# EAGLE board reclone-rise (EAGLE 7.5.0), part 1 of 2
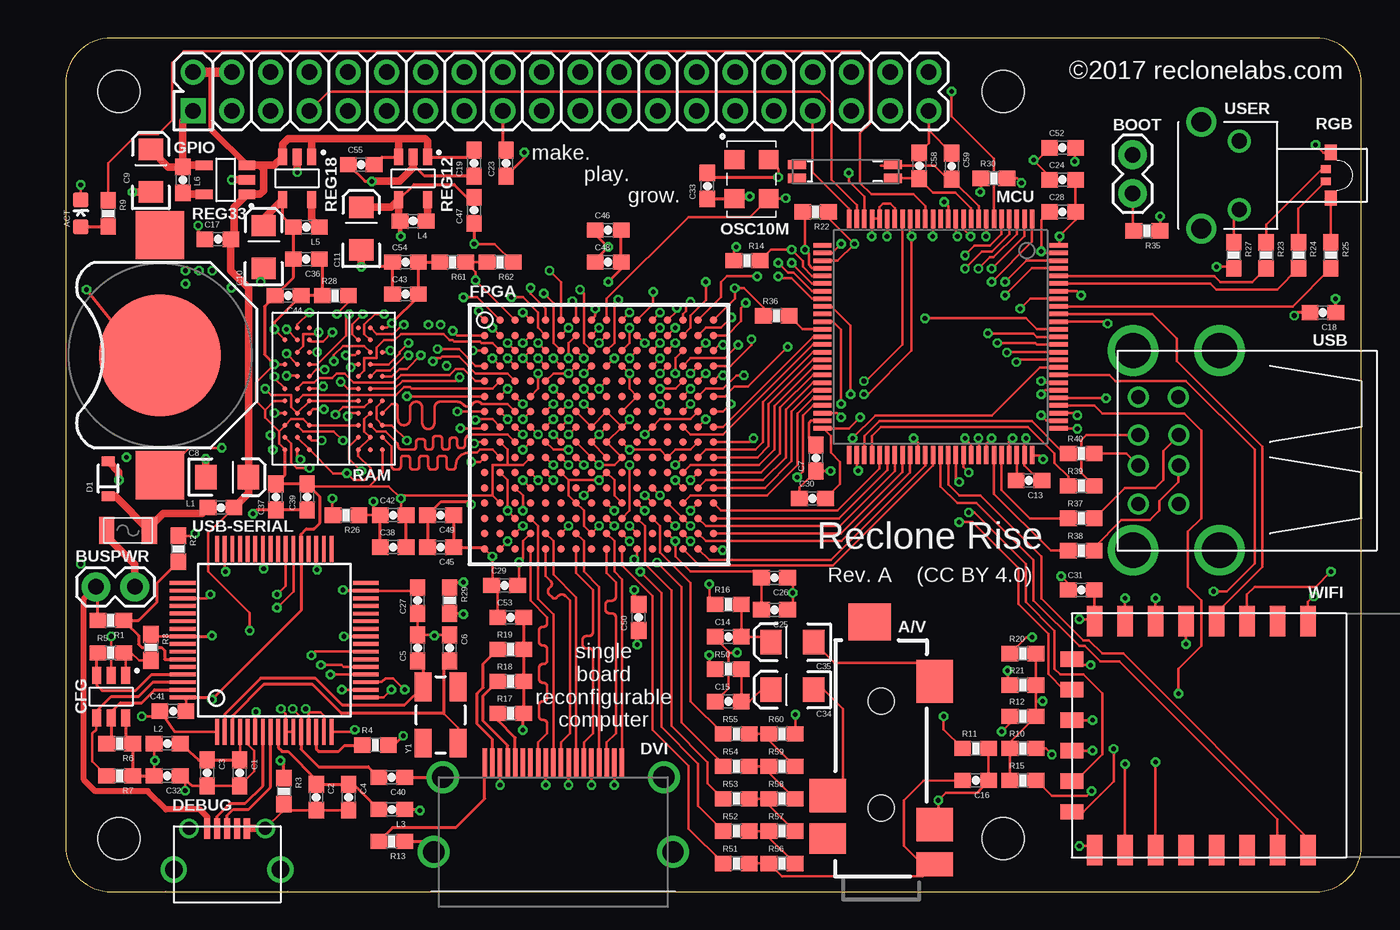
[diagram p0: board, top side]
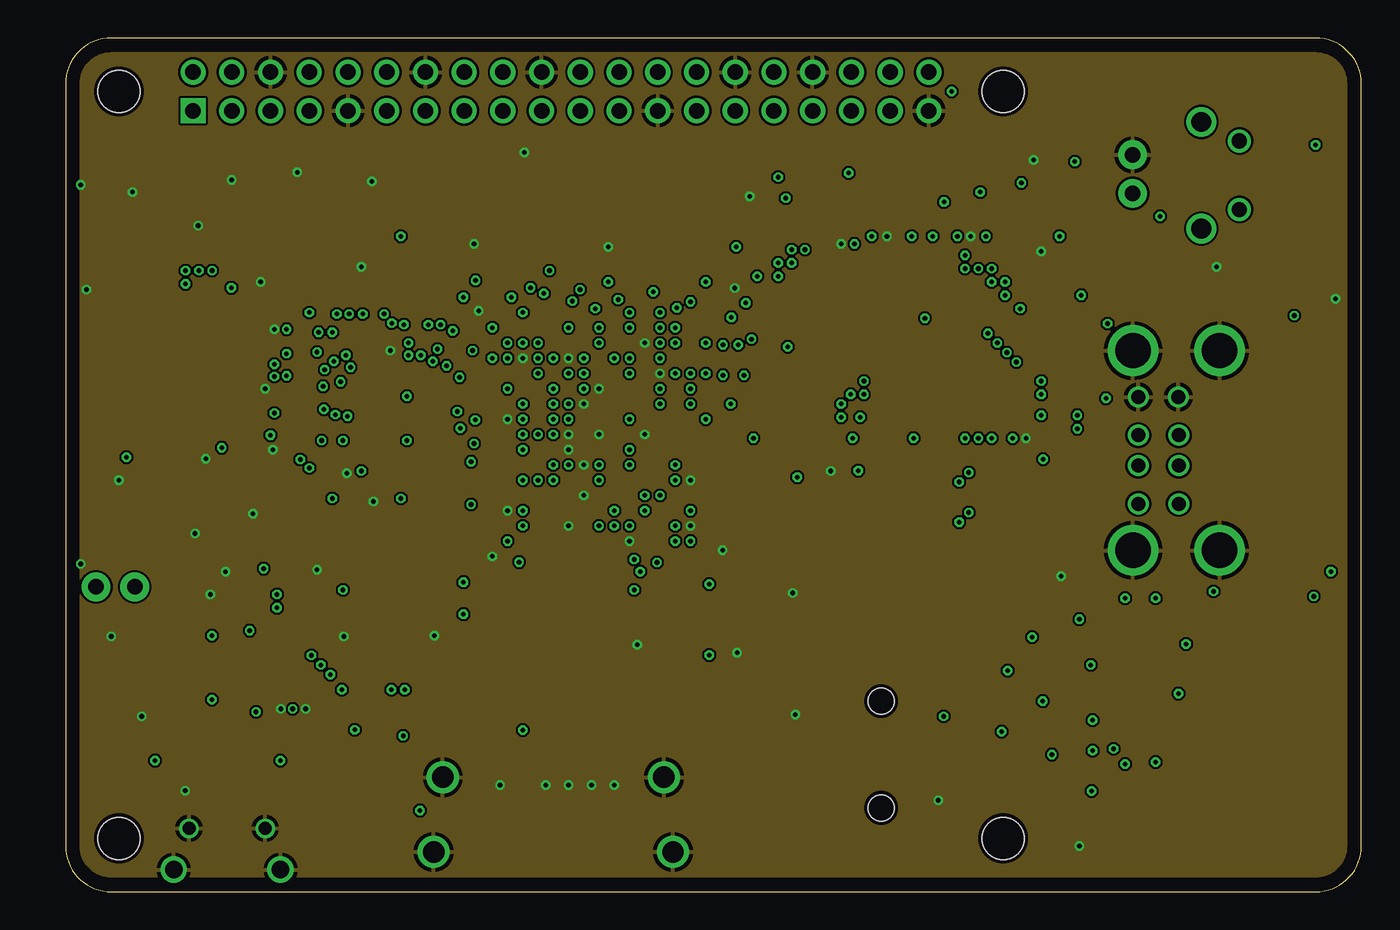
[diagram p1: board, inner layer GndPlane]
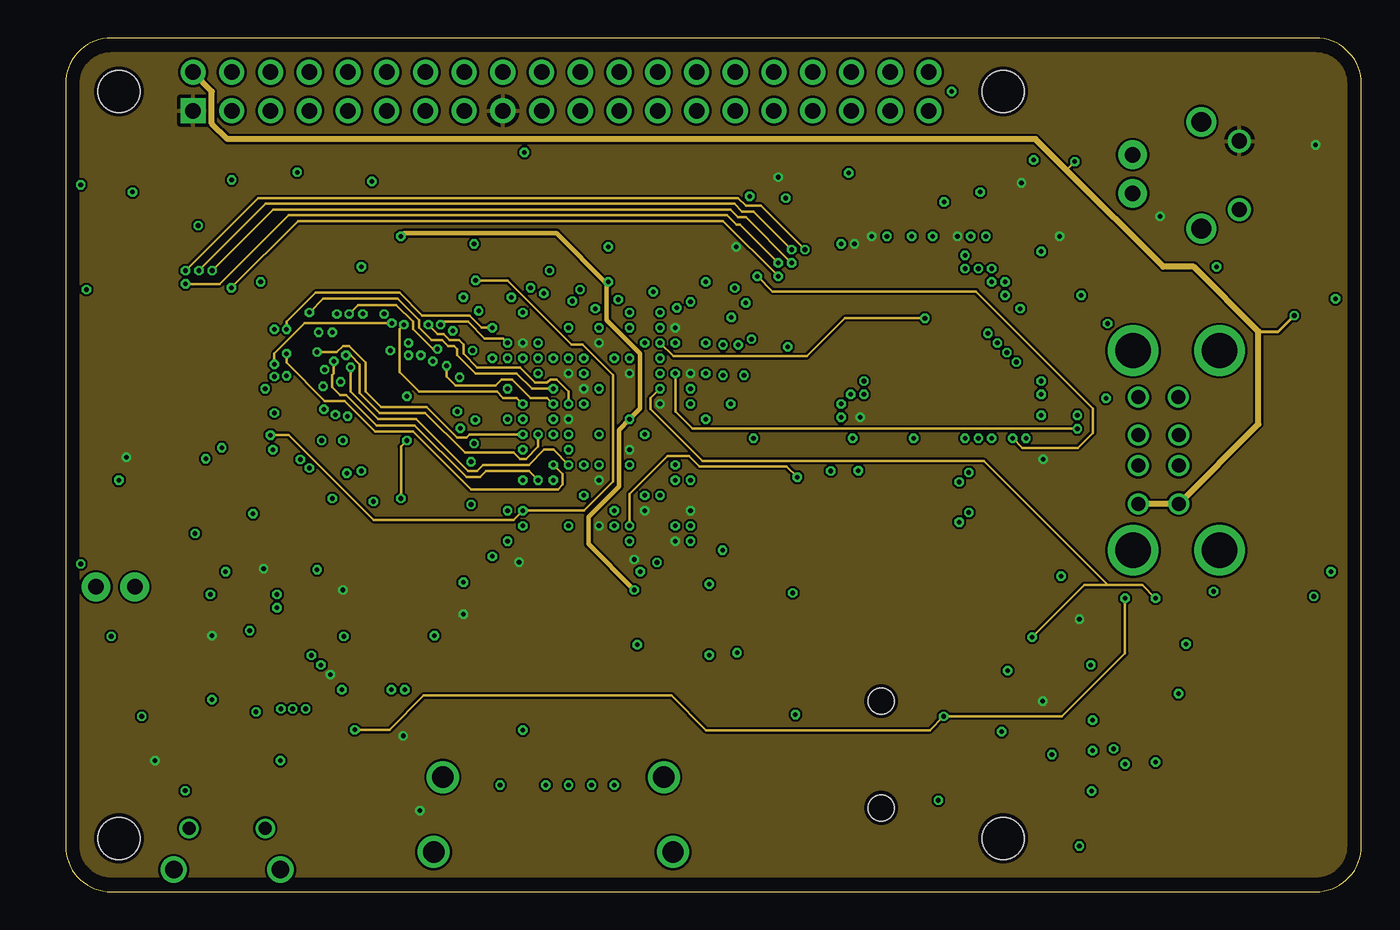
[diagram p2: board, inner layer PwrPlane]
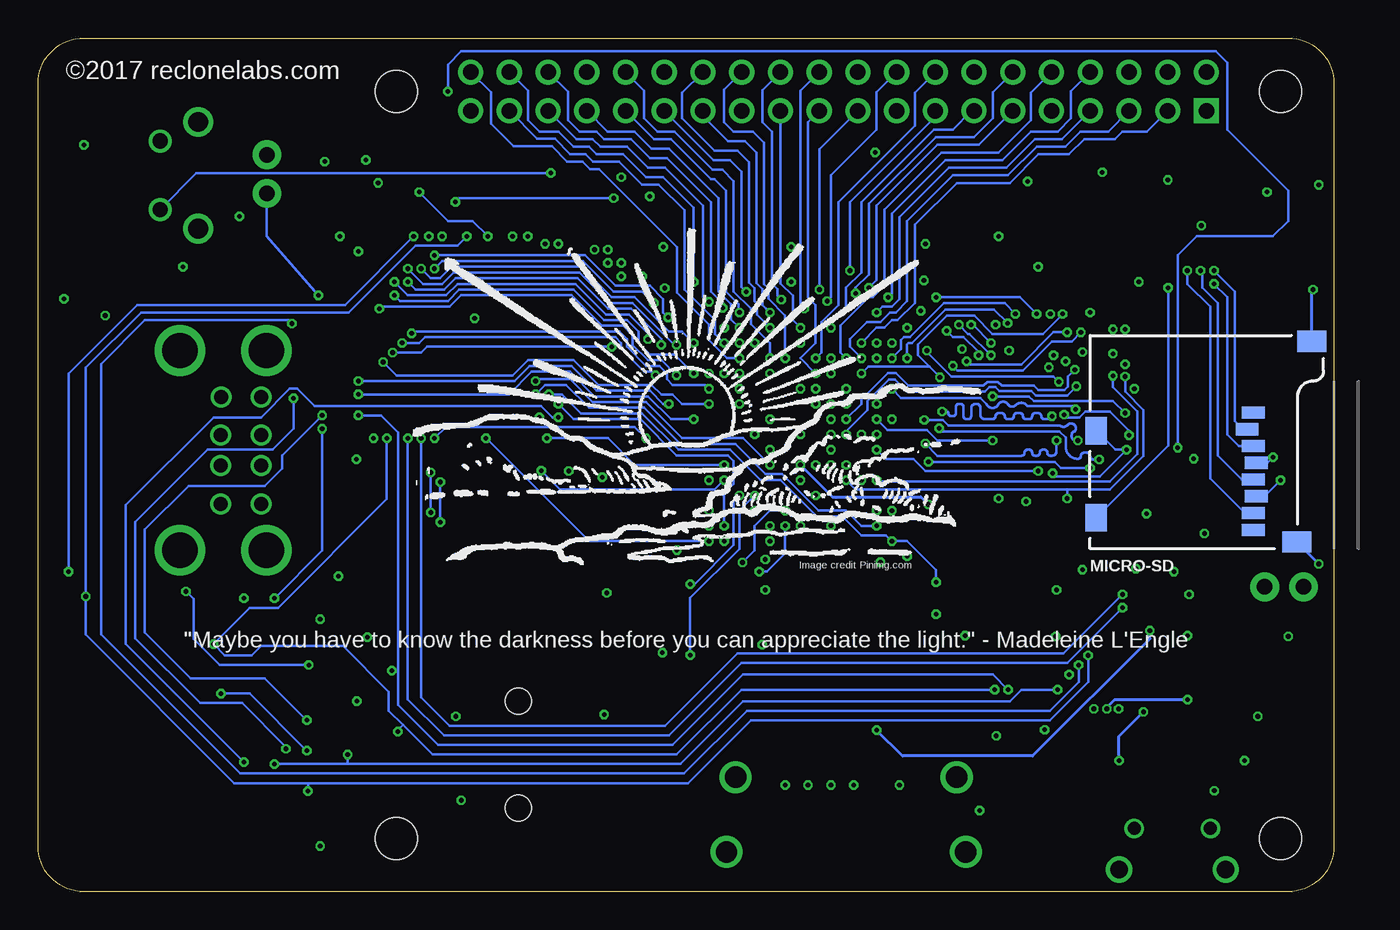
[diagram p3: board, bottom side, seen from below]

Size 85 x 56 mm. Coordinates in mm from the lower left corner, seen from the top.
Outline: 0,53 0,3 arc90 3,0 82,0 arc90 85,3 85,53 arc90 82,56 3,56 arc90 0,53
Copper layers (1*2*15*16): Top 0.035mm / dielectric 0.2mm / GndPlane 0.0175mm / dielectric 1.1mm / PwrPlane 0.0175mm / dielectric 0.2mm / Bottom 0.035mm
Design rules "SeeedStudio_DRU_no_angle_20130527": minimum track width 6mil, minimum drill 12mil, track to track 6mil, track to pad 6mil, pad to pad 6mil, via to via 6mil, smd to smd 0mil, copper to edge 10mil, drill to drill 10mil, minimum pad ring 6mil, minimum via ring 6mil, stop-mask expansion 2mil, vias tented up to drill 25mil, thermal gap 10mil
Net classes: 0 default: width 0.152 mm, drill 0.305 mm
Holes 2.75 mm at 3.5,3.5 3.5,52.5 61.5,52.5 61.5,3.5

## Footprints (pad centres in the part's own frame; a part is rotated, then mirrored left to right if it is on the bottom)
AV-JACK-3.5MM-4COND-SMD = smd 2 x 2.4: NP@6 2.5,3.5 | smd 2.2 x 2.4: RING1 5.3,3.5; RING2 3.4,-3.5 | smd 1.6 x 2.4: SLEEVE 0.8,-3.5 | smd 2.8 x 2.4: TIP 12.8,-3.5 | smd 2.4 x 2.8: TIP-SWITCH 16.7,0.75 | hole 1.7: 4.5,0; 11.5,0
LED-0603 = smd 1 x 1: A 0,-0.877; C 0,0.877
BATTCON_12MM = smd 8 x 8: GND 0,0 | smd 3.175 x 3.175: PWR@1 -7.874,0; PWR@2 7.874,0
1X02 = drill 1.016 pad 1.88: 1 0,0; 2 2.54,0
0603-CAP = smd 1.1 x 1: 1 -0.85,0; 2 0.85,0
EIA3216 = smd 1.4 x 1.6: A 1.4,0; C -1.4,0
SOT-23-6 = smd 0.6 x 1.1: 1 -0.95,-1.4; 2 0,-1.4; 3 0.95,-1.4; 4 0.95,1.4; 5 0,1.4; 6 -0.95,1.4
SOD-323 = smd 0.63 x 0.83: A 1.15,0; C -1.15,0
USB-MICRO-B-SMD = smd 0.4 x 1.35: 1 -1.3,4.15; 2 -0.65,4.15; 3 0,4.15; 4 0.65,4.15; 5 1.3,4.15 | drill 1.15: MNT1 -3.5,1.45; MNT4 3.5,1.45 | drill 0.85: MNT2 -2.5,4.15; MNT3 2.5,4.15
TMDS_A_SMT = smd 1.9 x 0.3: P1 -4.76,4.5; P2 -4.76,4; P3 -4.76,3.5; P4 -4.76,3; P5 -4.76,2.5; P6 -4.76,2; P7 -4.76,1.5; P8 -4.76,1; P9 -4.76,0.5; P10 -4.76,0; P11 -4.76,-0.5; P12 -4.76,-1; P13 -4.76,-1.5; P14 -4.76,-2; P15 -4.76,-2.5; P16 -4.76,-3; P17 -4.76,-3.5; P18 -4.76,-4; P19 -4.76,-4.5 | drill 1.4: SH1 1.09,7.85; SH2 -3.81,7.25; SH3 -3.81,-7.25; SH4 1.09,-7.85
1206L = smd 1 x 1.8: 1 -1.4,0; 2 1.4,0
FT256 = smd 0.5 x 0.5: A1 -7.5,7.5; A2 -6.5,7.5; A3 -5.5,7.5; A4 -4.5,7.5; A5 -3.5,7.5; A6 -2.5,7.5; A7 -1.5,7.5; A8 -0.5,7.5; A9 0.5,7.5; A10 1.5,7.5; A11 2.5,7.5; A12 3.5,7.5; A13 4.5,7.5; A14 5.5,7.5; A15 6.5,7.5; A16 7.5,7.5; B1 -7.5,6.5; B2 -6.5,6.5; B3 -5.5,6.5; B4 -4.5,6.5; B5 -3.5,6.5; B6 -2.5,6.5; B7 -1.5,6.5; B8 -0.5,6.5; B9 0.5,6.5; B10 1.5,6.5; B11 2.5,6.5; B12 3.5,6.5; B13 4.5,6.5; B14 5.5,6.5; B15 6.5,6.5; B16 7.5,6.5; C1 -7.5,5.5; C2 -6.5,5.5; C3 -5.5,5.5; C4 -4.5,5.5; C5 -3.5,5.5; C6 -2.5,5.5; C7 -1.5,5.5; C8 -0.5,5.5; C9 0.5,5.5; C10 1.5,5.5; C11 2.5,5.5; C12 3.5,5.5; C13 4.5,5.5; C14 5.5,5.5; C15 6.5,5.5; C16 7.5,5.5; D1 -7.5,4.5; D2 -6.5,4.5; D3 -5.5,4.5; D4 -4.5,4.5; D5 -3.5,4.5; D6 -2.5,4.5; D7 -1.5,4.5; D8 -0.5,4.5; D9 0.5,4.5; D10 1.5,4.5; D11 2.5,4.5; D12 3.5,4.5; D13 4.5,4.5; D14 5.5,4.5; D15 6.5,4.5; D16 7.5,4.5; E1 -7.5,3.5; E2 -6.5,3.5; E3 -5.5,3.5; E4 -4.5,3.5; E5 -3.5,3.5; E6 -2.5,3.5; E7 -1.5,3.5; E8 -0.5,3.5; E9 0.5,3.5; E10 1.5,3.5; E11 2.5,3.5; E12 3.5,3.5; E13 4.5,3.5; E14 5.5,3.5; E15 6.5,3.5; E16 7.5,3.5; F1 -7.5,2.5; F2 -6.5,2.5; F3 -5.5,2.5; F4 -4.5,2.5; F5 -3.5,2.5; F6 -2.5,2.5; F7 -1.5,2.5; F8 -0.5,2.5; F9 0.5,2.5; F10 1.5,2.5; F11 2.5,2.5; F12 3.5,2.5; F13 4.5,2.5; F14 5.5,2.5; F15 6.5,2.5; F16 7.5,2.5; G1 -7.5,1.5; G2 -6.5,1.5; G3 -5.5,1.5; G4 -4.5,1.5; G5 -3.5,1.5; G6 -2.5,1.5; G7 -1.5,1.5; G8 -0.5,1.5; G9 0.5,1.5; G10 1.5,1.5; G11 2.5,1.5; G12 3.5,1.5; G13 4.5,1.5; G14 5.5,1.5; G15 6.5,1.5; G16 7.5,1.5; H1 -7.5,0.5; H2 -6.5,0.5; H3 -5.5,0.5; H4 -4.5,0.5; H5 -3.5,0.5; H6 -2.5,0.5; H7 -1.5,0.5; H8 -0.5,0.5; H9 0.5,0.5; H10 1.5,0.5; H11 2.5,0.5; H12 3.5,0.5; H13 4.5,0.5; H14 5.5,0.5; H15 6.5,0.5; H16 7.5,0.5; J1 -7.5,-0.5; J2 -6.5,-0.5; J3 -5.5,-0.5; J4 -4.5,-0.5; J5 -3.5,-0.5; J6 -2.5,-0.5; J7 -1.5,-0.5; J8 -0.5,-0.5; J9 0.5,-0.5; J10 1.5,-0.5; J11 2.5,-0.5; J12 3.5,-0.5; J13 4.5,-0.5; J14 5.5,-0.5; J15 6.5,-0.5; J16 7.5,-0.5; K1 -7.5,-1.5; K2 -6.5,-1.5; K3 -5.5,-1.5; K4 -4.5,-1.5; K5 -3.5,-1.5; K6 -2.5,-1.5; K7 -1.5,-1.5; K8 -0.5,-1.5; K9 0.5,-1.5; K10 1.5,-1.5; K11 2.5,-1.5; K12 3.5,-1.5; K13 4.5,-1.5; K14 5.5,-1.5; K15 6.5,-1.5; K16 7.5,-1.5; L1 -7.5,-2.5; L2 -6.5,-2.5; L3 -5.5,-2.5; L4 -4.5,-2.5; L5 -3.5,-2.5; L6 -2.5,-2.5; L7 -1.5,-2.5; L8 -0.5,-2.5; L9 0.5,-2.5; L10 1.5,-2.5; L11 2.5,-2.5; L12 3.5,-2.5; L13 4.5,-2.5; L14 5.5,-2.5; L15 6.5,-2.5; L16 7.5,-2.5; M1 -7.5,-3.5; M2 -6.5,-3.5; M3 -5.5,-3.5; M4 -4.5,-3.5; M5 -3.5,-3.5; M6 -2.5,-3.5; M7 -1.5,-3.5; M8 -0.5,-3.5; M9 0.5,-3.5; M10 1.5,-3.5; M11 2.5,-3.5; M12 3.5,-3.5; M13 4.5,-3.5; M14 5.5,-3.5; M15 6.5,-3.5; M16 7.5,-3.5; N1 -7.5,-4.5; N2 -6.5,-4.5; N3 -5.5,-4.5; N4 -4.5,-4.5; N5 -3.5,-4.5; N6 -2.5,-4.5; N7 -1.5,-4.5; N8 -0.5,-4.5; N9 0.5,-4.5; N10 1.5,-4.5; N11 2.5,-4.5; N12 3.5,-4.5; N13 4.5,-4.5; N14 5.5,-4.5; N15 6.5,-4.5; N16 7.5,-4.5; P1 -7.5,-5.5; P2 -6.5,-5.5; P3 -5.5,-5.5; P4 -4.5,-5.5; P5 -3.5,-5.5; P6 -2.5,-5.5; P7 -1.5,-5.5; P8 -0.5,-5.5; P9 0.5,-5.5; P10 1.5,-5.5; P11 2.5,-5.5; P12 3.5,-5.5; P13 4.5,-5.5; P14 5.5,-5.5; P15 6.5,-5.5; P16 7.5,-5.5; R1 -7.5,-6.5; R2 -6.5,-6.5; R3 -5.5,-6.5; R4 -4.5,-6.5; R5 -3.5,-6.5; R6 -2.5,-6.5; R7 -1.5,-6.5; R8 -0.5,-6.5; R9 0.5,-6.5; R10 1.5,-6.5; R11 2.5,-6.5; R12 3.5,-6.5; R13 4.5,-6.5; R14 5.5,-6.5; R15 6.5,-6.5; R16 7.5,-6.5; T1 -7.5,-7.5; T2 -6.5,-7.5; T3 -5.5,-7.5; T4 -4.5,-7.5; T5 -3.5,-7.5; T6 -2.5,-7.5; T7 -1.5,-7.5; T8 -0.5,-7.5; T9 0.5,-7.5; T10 1.5,-7.5; T11 2.5,-7.5; T12 3.5,-7.5; T13 4.5,-7.5; T14 5.5,-7.5; T15 6.5,-7.5; T16 7.5,-7.5
2X20 = drill 1.016 pad 1.651 square: 1 -24.13,-1.27 | drill 1.016 pad 1.651: 2 -24.13,1.27; 3 -21.59,-1.27; 4 -21.59,1.27; 5 -19.05,-1.27; 6 -19.05,1.27; 7 -16.51,-1.27; 8 -16.51,1.27; 9 -13.97,-1.27; 10 -13.97,1.27; 11 -11.43,-1.27; 12 -11.43,1.27; 13 -8.89,-1.27; 14 -8.89,1.27; 15 -6.35,-1.27; 16 -6.35,1.27; 17 -3.81,-1.27; 18 -3.81,1.27; 19 -1.27,-1.27; 20 -1.27,1.27; 21 1.27,-1.27; 22 1.27,1.27; 23 3.81,-1.27; 24 3.81,1.27; 25 6.35,-1.27; 26 6.35,1.27; 27 8.89,-1.27; 28 8.89,1.27; 29 11.43,-1.27; 30 11.43,1.27; 31 13.97,-1.27; 32 13.97,1.27; 33 16.51,-1.27; 34 16.51,1.27; 35 19.05,-1.27; 36 19.05,1.27; 37 21.59,-1.27; 38 21.59,1.27; 39 24.13,-1.27; 40 24.13,1.27
0603 = smd 1.1 x 1: 1 -0.85,0; 2 0.85,0
LQFP-100 = smd 0.3 x 1.2: 1 -6,-7.75; 2 -5.5,-7.75; 3 -5,-7.75; 4 -4.5,-7.75; 5 -4,-7.75; 6 -3.5,-7.75; 7 -3,-7.75; 8 -2.5,-7.75; 9 -2,-7.75; 10 -1.5,-7.75; 11 -1,-7.75; 12 -0.5,-7.75; 13 0,-7.75; 14 0.5,-7.75; 15 1,-7.75; 16 1.5,-7.75; 17 2,-7.75; 18 2.5,-7.75; 19 3,-7.75; 20 3.5,-7.75; 21 4,-7.75; 22 4.5,-7.75; 23 5,-7.75; 24 5.5,-7.75; 25 6,-7.75; 51 6,7.75; 52 5.5,7.75; 53 5,7.75; 54 4.5,7.75; 55 4,7.75; 56 3.5,7.75; 57 3,7.75; 58 2.5,7.75; 59 2,7.75; 60 1.5,7.75; 61 1,7.75; 62 0.5,7.75; 63 0,7.75; 64 -0.5,7.75; 65 -1,7.75; 66 -1.5,7.75; 67 -2,7.75; 68 -2.5,7.75; 69 -3,7.75; 70 -3.5,7.75; 71 -4,7.75; 72 -4.5,7.75; 73 -5,7.75; 74 -5.5,7.75; 75 -6,7.75 | smd 1.2 x 0.3: 26 7.75,-6; 27 7.75,-5.5; 28 7.75,-5; 29 7.75,-4.5; 30 7.75,-4; 31 7.75,-3.5; 32 7.75,-3; 33 7.75,-2.5; 34 7.75,-2; 35 7.75,-1.5; 36 7.75,-1; 37 7.75,-0.5; 38 7.75,0; 39 7.75,0.5; 40 7.75,1; 41 7.75,1.5; 42 7.75,2; 43 7.75,2.5; 44 7.75,3; 45 7.75,3.5; 46 7.75,4; 47 7.75,4.5; 48 7.75,5; 49 7.75,5.5; 50 7.75,6; 76 -7.75,6; 77 -7.75,5.5; 78 -7.75,5; 79 -7.75,4.5; 80 -7.75,4; 81 -7.75,3.5; 82 -7.75,3; 83 -7.75,2.5; 84 -7.75,2; 85 -7.75,1.5; 86 -7.75,1; 87 -7.75,0.5; 88 -7.75,0; 89 -7.75,-0.5; 90 -7.75,-1; 91 -7.75,-1.5; 92 -7.75,-2; 93 -7.75,-2.5; 94 -7.75,-3; 95 -7.75,-3.5; 96 -7.75,-4; 97 -7.75,-4.5; 98 -7.75,-5; 99 -7.75,-5.5; 100 -7.75,-6
MICRO-SD-SOCKET-PP = smd 0.8 x 1.5: 1 -3.44,-5.3; 2 -2.34,-5.7; 3 -1.24,-5.3; 4 -0.14,-5.1; 5 0.96,-5.3; 6 2.06,-5.1; 7 3.16,-5.3; 8 4.26,-5.3 | smd 1.8 x 1.4: CD 3.45,-15.6; GND2 -2.25,-15.6 | smd 1.4 x 1.9: GND1 -8.1,-1.45; GND3 5.05,-2.45
OSC-5X3.2 = smd 1.24 x 1.29: 1 -1.27,-1.125; 2 1.27,-1.125; 3 1.27,1.125; 4 -1.27,1.125
0603-RES = smd 1.1 x 1: 1 -0.85,0; 2 0.85,0
60-FBGA-8X10 = smd 0.34 x 0.34: A1 -3.2,4; A2 -2.4,4; A3 -1.6,4; A7 1.6,4; A8 2.4,4; A9 3.2,4; B1 -3.2,3.2; B2 -2.4,3.2; B3 -1.6,3.2; B7 1.6,3.2; B8 2.4,3.2; B9 3.2,3.2; C1 -3.2,2.4; C2 -2.4,2.4; C3 -1.6,2.4; C7 1.6,2.4; C8 2.4,2.4; C9 3.2,2.4; D1 -3.2,1.6; D2 -2.4,1.6; D3 -1.6,1.6; D7 1.6,1.6; D8 2.4,1.6; D9 3.2,1.6; E1 -3.2,0.8; E2 -2.4,0.8; E3 -1.6,0.8; E7 1.6,0.8; E8 2.4,0.8; E9 3.2,0.8; F2 -2.4,0; F3 -1.6,0; F7 1.6,0; F8 2.4,0; F9 3.2,0; G1 -3.2,-0.8; G2 -2.4,-0.8; G3 -1.6,-0.8; G7 1.6,-0.8; G8 2.4,-0.8; H2 -2.4,-1.6; H3 -1.6,-1.6; H7 1.6,-1.6; H8 2.4,-1.6; H9 3.2,-1.6; J1 -3.2,-2.4; J2 -2.4,-2.4; J3 -1.6,-2.4; J7 1.6,-2.4; J8 2.4,-2.4; K2 -2.4,-3.2; K3 -1.6,-3.2; K7 1.6,-3.2; K8 2.4,-3.2; K9 3.2,-3.2; L1 -3.2,-4; L2 -2.4,-4; L3 -1.6,-4; L7 1.6,-4; L8 2.4,-4
SOT-23-5 = smd 0.6 x 1.1: 1 -0.95,-1.4; 2 0,-1.4; 3 0.95,-1.4; 4 0.95,1.4; 5 -0.95,1.4
RGB_LED_1204_RTANG = smd 0.65 x 0.5: 1 0.325,-0.4; 2 0.325,0.4 | smd 0.8 x 1: 3 0,1.5; 4 0,-1.5
USB-A-2H = drill 0.914: DM1 -4.027,1.05; DM2 -1.37,1.05; DP1 -4.027,-0.95; DP2 -1.37,-0.95; GND1 -3.99,-3.45; GND2 -1.37,-3.45; VBUS1 -4.027,3.55; VBUS2 -1.37,3.55 | drill 2.311: SH1 -6.7,-6.5; SH2 -1.02,-6.5; SH3 -1.02,6.6; SH4 -6.7,6.6
TQFP64-12X12 = smd 0.25 x 1.7: 1 -3.75,-6; 2 -3.25,-6; 3 -2.75,-6; 4 -2.25,-6; 5 -1.75,-6; 6 -1.25,-6; 7 -0.75,-6; 8 -0.25,-6; 9 0.25,-6; 10 0.75,-6; 11 1.25,-6; 12 1.75,-6; 13 2.25,-6; 14 2.75,-6; 15 3.25,-6; 16 3.75,-6; 33 3.75,6; 34 3.25,6; 35 2.75,6; 36 2.25,6; 37 1.75,6; 38 1.25,6; 39 0.75,6; 40 0.25,6; 41 -0.25,6; 42 -0.75,6; 43 -1.25,6; 44 -1.75,6; 45 -2.25,6; 46 -2.75,6; 47 -3.25,6; 48 -3.75,6 | smd 1.7 x 0.25: 17 6,-3.75; 18 6,-3.25; 19 6,-2.75; 20 6,-2.25; 21 6,-1.75; 22 6,-1.25; 23 6,-0.75; 24 6,-0.25; 25 6,0.25; 26 6,0.747; 27 6,1.247; 28 6,1.747; 29 6,2.247; 30 6,2.747; 31 6,3.247; 32 6,3.747; 49 -6,3.75; 50 -6,3.25; 51 -6,2.75; 52 -6,2.25; 53 -6,1.75; 54 -6,1.25; 55 -6,0.75; 56 -6,0.25; 57 -6,-0.25; 58 -6,-0.75; 59 -6,-1.25; 60 -6,-1.75; 61 -6,-2.25; 62 -6,-2.75; 63 -6,-3.25; 64 -6,-3.75
PB_TACT_RTANG = drill 1.3: MNT_A -3.5,2.5; MNT_B 3.5,2.5 | drill 1: SW_A -2.25,0; SW_B 2.25,0
ESP-12F = smd 2 x 1: 1 -7.5,-2.5; 2 -7.5,-4.5; 3 -7.5,-6.5; 4 -7.5,-8.5; 5 -7.5,-10.5; 6 -7.5,-12.5; 7 -7.5,-14.5; 8 -7.5,-16.5; 15 7.5,-16.5; 16 7.5,-14.5; 17 7.5,-12.5; 18 7.5,-10.5; 19 7.5,-8.5; 20 7.5,-6.5; 21 7.5,-4.5; 22 7.5,-2.5 | smd 1 x 1.5: 9 -5,-18; 10 -3,-18; 11 -1,-18; 12 1,-18; 13 3,-18; 14 5,-18
CRYSTAL-SMD-5X3 = smd 1.9 x 1.1: 1 -1.85,-1.15; 2 1.85,-1.15; 3 1.85,1.15; 4 -1.85,1.15
CRYSTAL-32KHZ-SMD_EPSON_MC146 = smd 1.2 x 0.6: NC1 6.9,1.2; NC2 6.9,0.3; P$1 0.6,0.3; P$2 0.6,1.2

## Placement (x,y rotation side)
A/V  AV-JACK-4COND  [AV-JACK-3.5MM-4COND-SMD]  53.5,1 90 top
ACT  RED  [LED-0603]  1,44.5 0 top
BAT  3V  [BATTCON_12MM]  6.2,35.2 90 top
BOOT  1X2  [1X02]  70,48.35 270 top
BUSPWR  1X2  [1X02]  2,20 0 top
C1  4u7  [0603-CAP]  11.43,7.8 270 top
C2  4u7  [0603-CAP]  16.45,6.2 270 top
C3  0u47  [0603-CAP]  9.3,7.8 270 top
C4  0u47  [0603-CAP]  18.57,6.2 270 top
C5  27p  [0603-CAP]  23.1,16 90 top
C6  27p  [0603-CAP]  25.2,16 270 top
C7  2u2  [0603-CAP]  49.23,28.45 90 top
C8  100u  [EIA3216]  10.6,27.2 0 top
C9  100u  [EIA3216]  5.6,47.3 90 top
C10  100u  [EIA3216]  13,42.3 90 top
C11  100u  [EIA3216]  19.4,43.5 90 top
C13  2u2  [0603-CAP]  63.2,26.98 180 top
C14  47n  [0603-CAP]  43.48,16.73 0 top
C15  47n  [0603-CAP]  43.48,12.47 0 top
C16  27p  [0603-CAP]  59.7,7.3 180 top
C17  4u7  [0603-CAP]  10,42.8 0 top
C18  4u7  [0603-CAP]  82.47,38 180 top
C19  4u7  [0603-CAP]  26.8,47.8 90 top
C23  4u7  [0603-CAP]  28.9,47.8 90 top
C24  4u7  [0603-CAP]  65.4,46.7 0 top
C25  4u7  [0603-CAP]  46.5,18.5 180 top
C26  0u47  [0603-CAP]  46.5,20.6 180 top
C27  0u47  [0603-CAP]  23.1,19.1 90 top
C28  0u47  [0603-CAP]  65.4,44.6 0 top
C29  0u47  [0603-CAP]  28.8,20.1 0 top
C30  0u47  [0603-CAP]  49,25.8 0 top
C31  0u47  [0603-CAP]  66.62,19.8 0 top
C32  0u47  [0603-CAP]  6.67,7.6 180 top
C33  0u47  [0603-CAP]  42.1,46.3 90 top
C34  100u  [EIA3216]  47.67,13.25 180 top
C35  100u  [EIA3216]  47.67,16.38 180 top
C36  4u7  [0603-CAP]  15.8,41.5 180 top
C37  4u7  [0603-CAP]  13.8,25.9 90 top
C38  4u7  [0603-CAP]  21.5,22.6 0 top
C39  0u47  [0603-CAP]  15.85,25.9 90 top
C40  0u47  [0603-CAP]  21.4,7.5 180 top
C41  0u47  [0603-CAP]  7.05,11.85 0 top
C42  0u47  [0603-CAP]  21.5,24.7 0 top
C43  0u47  [0603-CAP]  22.3,39.2 0 top
C44  0u47  [0603-CAP]  14.6,39.1 180 top
C45  4u7  [0603-CAP]  24.6,22.6 180 top
C46  4u7  [0603-CAP]  35.6,43.4 0 top
C47  0u47  [0603-CAP]  26.8,44.7 90 top
C48  0u47  [0603-CAP]  35.6,41.3 0 top
C49  0u47  [0603-CAP]  24.6,24.7 180 top
C50  0u47  [0603-CAP]  37.6,18 90 top
C52  4u7  [0603-CAP]  65.4,48.8 0 top
C53  4u7  [0603-CAP]  29.2,18 0 top
C54  4u7  [0603-CAP]  22.3,41.3 0 top
C55  4u7  [0603-CAP]  19.4,47.7 0 top
C58  6p8  [0603-CAP]  56,47.62 270 top
C59  6p8  [0603-CAP]  58.12,47.6 270 top
CFG  93LC46B  [SOT-23-6]  3,12.8 180 top
D1  5.6V  [SOD-323]  2.8,27.1 90 top
DEBUG  USB-MICRO-B-SMD  [USB-MICRO-B-SMD]  10.6,0 0 top
DVI  TMDS_A  [TMDS_A_SMT]  32,3.7 270 top
F1  POLYFUSE  [1206L]  4.1,23.7 0 top
FPGA  XC6SLX16FTG256  [FT256]  35,30 0 top
GPIO  M2X20  [2X20]  32.5,52.5 0 top
L1  BEAD  [0603]  10.2,25.2 0 top
L2  BEAD  [0603]  6.67,9.72 0 top
L3  BEAD  [0603]  21.4,5.4 180 top
L4  2u2  [0603]  22.8,44 180 top
L5  1u  [0603]  15.8,43.6 180 top
L6  4u7  [0603]  7.7,46.7 90 top
MCU  STM32F407VGT6  [LQFP-100]  57.4,36.4 180 top
MICRO-SD  USD-SOCKET  [MICRO-SD-SOCKET-PP]  0,28 270 bottom
OSC10M  10M  [OSC-5X3.2]  45,46.75 270 top
R1  4K7  [0603-RES]  2.98,17.8 180 top
R2  10K  [0603-RES]  7.4,22.5 270 top
R3  12K  [0603-RES]  14.32,6.6 270 top
R4  2K2  [0603-RES]  20.32,9.62 0 top
R5  2K2  [0603-RES]  2.98,15.68 0 top
R6  10K  [0603-RES]  3.55,9.72 180 top
R7  10K  [0603-RES]  3.55,7.6 180 top
R8  10K  [0603-RES]  5.6,16.02 270 top
R9  160  [0603-RES]  2.8,44.5 270 top
R10  4K7  [0603-RES]  62.8,9.4 0 top
R11  4K7  [0603-RES]  59.7,9.4 0 top
R12  4K7  [0603-RES]  62.8,11.5 0 top
R13  10K  [0603-RES]  21.4,3.3 180 top
R14  10K  [0603-RES]  44.7,41.4 0 top
R15  4K7  [0603-RES]  62.8,7.3 0 top
R16  165  [0603-RES]  43.48,18.85 0 top
R17  2K2  [0603-RES]  29.2,11.7 0 top
R18  2K2  [0603-RES]  29.2,13.8 0 top
R19  22  [0603-RES]  29.2,15.9 0 top
R20  4K7  [0603-RES]  62.8,15.62 0 top
R21  4K7  [0603-RES]  62.8,13.55 0 top
R22  10K  [0603-RES]  49.2,44.6 180 top
R23  160  [0603-RES]  78.75,41.75 270 top
R24  43  [0603-RES]  80.88,41.75 270 top
R25  39  [0603-RES]  83,41.75 270 top
R26  4K7  [0603-RES]  18.4,24.7 180 top
R27  4K7  [0603-RES]  76.62,41.75 270 top
R28  4K7  [0603-RES]  17.7,39.1 0 top
R29  4K7  [0603-RES]  25.2,19.1 270 top
R30  4K7  [0603-RES]  60.9,46.8 0 top
R35  10K  [0603-RES]  70.92,43.35 180 top
R36  10K  [0603-RES]  46.62,37.77 0 top
R37  22  [0603-RES]  66.62,24.5 0 top
R38  22  [0603-RES]  66.62,22.38 0 top
R39  22  [0603-RES]  66.62,26.62 0 top
R40  22  [0603-RES]  66.62,28.75 0 top
R50  165  [0603-RES]  43.48,14.6 0 top
R51  330  [0603-RES]  44,1.85 0 top
R52  330  [0603-RES]  44,3.98 0 top
R53  330  [0603-RES]  44,6.1 0 top
R54  330  [0603-RES]  44,8.22 0 top
R55  330  [0603-RES]  44,10.35 0 top
R56  165  [0603-RES]  47,1.85 0 top
R57  165  [0603-RES]  47,3.98 0 top
R58  165  [0603-RES]  47,6.1 0 top
R59  165  [0603-RES]  47,8.22 0 top
R60  330  [0603-RES]  47,10.35 0 top
R61  2K2  [0603-RES]  25.4,41.3 180 top
R62  2K2  [0603-RES]  28.5,41.3 180 top
RAM  AS4C128M8D2  [60-FBGA-8X10]  17.6,33 180 top
REG12  PAM2305AAB120  [SOT-23-5]  22.8,46.8 180 top
REG18  ADP2108AUJZ-1.8-R7  [SOT-23-5]  15.2,46.8 180 top
REG33  PAM2305AAB330  [SOT-23-5]  10.5,46.7 90 top
RGB  OVSRRGBCC3  [RGB_LED_1204_RTANG]  83,47 180 top
U$8  [SUNRISE-GRAPHIC]  60.9,21 0 bottom
USB  USB_A_2H  [USB-A-2H]  69,29 180 top
USB-SERIAL  FT2232H  [TQFP64-12X12]  13.7,16.5 0 top
USER  TL1105SF250Q  [PB_TACT_RTANG]  77,47 90 top
WIFI  ESP-12F  [ESP-12F]  84,10.25 270 top
Y1  12MHz  [CRYSTAL-SMD-5X3]  24.6,11.6 90 top
Y4  32K768  [CRYSTAL-32KHZ-SMD_EPSON_MC146]  54.88,48 180 top

## Library data of the parts
A/V = reclone-rise; DIGIKEY#: CP-43514SJCT-ND; MANF: CUI Inc.; MANF#: SJ-43514-SMT-TR
ACT = SparkFun-LED
BAT = SparkFun-Electromechanical; DIGIKEY#: BK-885-ND; MANF: MPD (Memory Protection Devices); MANF#: BK-885; PROD_ID: BATT-08044
BOOT BUSPWR = SparkFun-Connectors; DIGIKEY#: 952-1770-ND; MANF: Harwin Inc.; MANF#: M20-9770246
C1-C11 C13-C19 C23-C50 C52-C55 C58 C59 L1-L6 R1-R30 R35-R40 R50-R62 = SparkFun-Passives
CFG = reclone-rise; DIGIKEY#: 93LC46BT-I/OTCT-ND; MANF: Microchip Technology; MANF#: 93LC46BT-I/OT
D1 = SparkFun-DiscreteSemi; PROD_ID: DIO-12442
DEBUG = reclone-rise; DIGIKEY#: 609-4618-1-ND; MANF: FCI; MANF#: 10118194-0001LF
DVI = reclone-rise; DIGIKEY#: 609-4614-1-ND; MANF: FCI; MANF#: 10029449-111RLF
F1 = reclone-rise; DIGIKEY#: MF-NSMF150-2CT-ND; MANF: Bourns Inc.; MANF#: MF-NSMF150-2
FPGA = reclone-rise; DIGIKEY#: 122-1672-ND; MANF: Xilinx Inc.; MANF#: XC6SLX16-2FTG256C
GPIO = reclone-rise; DIGIKEY#: S2012EC-20-ND; MANF: Sullins Connector Solutions; MANF#: PREC020DAAN-RC
MCU = reclone-rise; DIGIKEY#: 497-11605-ND; MANF: STMicroelectronics; MANF#: STM32F407VGT6
MICRO-SD = reclone-rise; DIGIKEY#: 101-00660-68-6-1-ND; MANF: Amphenol; MANF#: 101-00660-68-6
OSC10M = reclone-rise; DIGIKEY#: 631-1436-1-ND; MANF: Fox Electronics; MANF#: F535L-10
RAM = reclone-rise; DIGIKEY#: 1450-1141-ND; MANF: Alliance Memory, Inc.; MANF#: AS4C128M8D2-25BCN
REG12 = reclone-rise; DIGIKEY#: PAM2305AAB120DICT-ND; MANF: Diodes Incorporated; MANF#: PAM2305AAB120
REG18 = reclone-rise; DIGIKEY#: ADP2108AUJZ-1.8-R7CT-ND; MANF: Analog Devices Inc.; MANF#: ADP2108AUJZ-1.8-R7
REG33 = reclone-rise; DIGIKEY#: PAM2305AAB330DICT-ND; MANF: Diodes Incorporated; MANF#: PAM2305AAB330
RGB = reclone-rise; DIGIKEY#: 365-1410-1-ND; MANF: TT Electronics/Optek Technology; MANF#: OVSRRGBCC3
U$8 USB WIFI = reclone-rise
USB-SERIAL = reclone-rise; DIGIKEY#: 768-1024-1-ND; MANF: FTDI, Future Technology Devices International Ltd; MANF#: FT2232HL-REEL
USER = reclone-rise; DIGIKEY#: EG1840-ND; MANF: E-Switch; MANF#: TL1105SF250Q
Y1 = SparkFun-FreqCtrl; PROD_ID: XTAL-08218
Y4 = SparkFun-FreqCtrl

## Nets
+1V2: C11.A C45.2 C46.2 C47.2 C48.2 C49.2 C50.2 FPGA.G7 FPGA.G9 FPGA.H8 FPGA.H10 FPGA.J7 FPGA.J9 FPGA.K8 FPGA.K10 L4.2 REG12.4
+1V8: C10.A C36.2 C37.2 C38.2 C39.2 C40.2 C41.2 C42.2 C43.2 C44.2 C54.2 FPGA.D2 FPGA.G4 FPGA.J2 FPGA.K4 FPGA.N2 L5.2 R61.2 RAM.A1 RAM.A9 RAM.C1 RAM.C3 RAM.C7 RAM.C9 RAM.E1 RAM.E9 RAM.H9 RAM.L1 REG18.4 USB-SERIAL.12 USB-SERIAL.37 USB-SERIAL.64
+3V3: C9.A C23.2 C24.2 C25.2 C26.2 C27.2 C28.2 C29.2 C30.2 C31.2 C32.2 C33.2 CFG.6 FPGA.B4 FPGA.B9 FPGA.B13 FPGA.D7 FPGA.D10 FPGA.D15 FPGA.E5 FPGA.F8 FPGA.F11 FPGA.G10 FPGA.G13 FPGA.H6 FPGA.J10 FPGA.J15 FPGA.K13 FPGA.L6 FPGA.L9 FPGA.N7 FPGA.N10 FPGA.N11 FPGA.N15 FPGA.R4 FPGA.R8 FPGA.R13 FPGA.T11 GPIO.1 GPIO.17 L2.1 L3.1 L6.2 MCU.11 MCU.19 MCU.21 MCU.22 MCU.28 MCU.50 MCU.75 MCU.100 MICRO-SD.4 OSC10M.4 R4.2 R6.1 R7.1 R8.1 R10.1 R12.2 R14.1 R15.1 R20.2 R21.2 R22.1 R29.2 R30.2 R35.1 REG33.4 RGB.4 USB-SERIAL.20 USB-SERIAL.31 USB-SERIAL.42 USB-SERIAL.56 USER.SW_B WIFI.8
+5V: C8.A C17.2 C18.2 C19.2 C52.2 C53.2 C55.2 GPIO.2 GPIO.4 L1.2 R17.2 R18.2 R19.2 REG12.1 REG12.3 REG18.1 REG18.3 REG33.1 REG33.3 USB.VBUS1 USB.VBUS2
/RESET: MCU.14 R15.2 USB-SERIAL.23 WIFI.1
AUDIO_L: FPGA.M12 R16.1
AUDIO_R: FPGA.N12 R50.1
BOOT0: BOOT.2 MCU.94 R35.2
BOOT1: MCU.37 R36.2
CLK_10M: FPGA.A9 MCU.12 OSC10M.3
CONSOLE_RXD: MCU.69 USB-SERIAL.38
CONSOLE_TXD: MCU.68 USB-SERIAL.39
DDR2_VREF: FPGA.A3 FPGA.M3 R61.1 R62.2 RAM.E2
ESP8266_DBG: MCU.48 WIFI.17
ESP8266_RX: MCU.63 WIFI.21
ESP8266_TX: MCU.64 WIFI.22
ESP_CH_EN: MCU.7 WIFI.3
FPGA_CONFIG_CLK: FPGA.R11 MCU.47
FPGA_CONFIG_DIN: FPGA.P10 MCU.18
FPGA_CONFIG_DONE: FPGA.P13 MCU.36
FPGA_CONFIG_INIT_B: FPGA.R3 MCU.17 R30.1
FPGA_CONFIG_PROGRAM_B: FPGA.T2 MCU.34 R29.1
FPGA_INT: FPGA.M14 MCU.52
FSMC_A16: FPGA.R16 MCU.58
FSMC_A17: FPGA.R15 MCU.59
FSMC_A18: FPGA.R14 MCU.60
FSMC_A19: FPGA.C16 MCU.2
FSMC_A20: FPGA.C15 MCU.3
FSMC_A21: FPGA.B16 MCU.4
FSMC_A22: FPGA.B15 MCU.5
FSMC_A23: FPGA.D14 MCU.1
FSMC_CLK: FPGA.K14 MCU.84
FSMC_D0: FPGA.T15 MCU.61
FSMC_D1: FPGA.T14 MCU.62
FSMC_D2: FPGA.H15 MCU.81
FSMC_D3: FPGA.G16 MCU.82
FSMC_D4: FPGA.H16 MCU.38
FSMC_D5: FPGA.H14 MCU.39
FSMC_D6: FPGA.K15 MCU.40
FSMC_D7: FPGA.K16 MCU.41
FSMC_D8: FPGA.L14 MCU.42
FSMC_D9: FPGA.L16 MCU.43
FSMC_D10: FPGA.M15 MCU.44
FSMC_D11: FPGA.M16 MCU.45
FSMC_D12: FPGA.N14 MCU.46
FSMC_D13: FPGA.N16 MCU.55
FSMC_D14: FPGA.P16 MCU.56
FSMC_D15: FPGA.P15 MCU.57
FSMC_NBL0: FPGA.E15 MCU.97
FSMC_NBL1: FPGA.D16 MCU.98
FSMC_NE1: FPGA.F14 MCU.88
FSMC_NL: FPGA.E16 MCU.93
FSMC_NOE: FPGA.G14 MCU.85
FSMC_NWAIT: FPGA.F15 MCU.87
FSMC_NWE: FPGA.F16 MCU.86
GND: A/V.RING2 ACT.C BAT.GND BOOT.1 C1.2 C2.2 C3.2 C4.2 C5.2 C6.1 C7.1 C8.C C9.C C10.C C11.C C13.1 C14.1 C15.1 C16.1 C17.1 C18.1 C19.1 C23.1 C24.1 C25.1 C26.1 C27.1 C28.1 C29.1 C30.1 C31.1 C32.1 C33.1 C36.1 C37.1 C38.1 C39.1 C40.1 C41.1 C42.1 C43.1 C44.1 C45.1 C46.1 C47.1 C48.1 C49.1 C50.1 C52.1 C53.1 C54.1 C55.1 C58.1 C59.1 CFG.2 D1.A DEBUG.5 DEBUG.MNT1 DEBUG.MNT2 DEBUG.MNT3 DEBUG.MNT4 DVI.P2 DVI.P5 DVI.P8 DVI.P11 DVI.P17 DVI.SH1 DVI.SH2 DVI.SH3 DVI.SH4 FPGA.A1 FPGA.A16 FPGA.B7 FPGA.B11 FPGA.C4 FPGA.D4 FPGA.D13 FPGA.E9 FPGA.G2 FPGA.G8 FPGA.G15 FPGA.H7 FPGA.H9 FPGA.H12 FPGA.J5 FPGA.J8 FPGA.K7 FPGA.K9 FPGA.L2 FPGA.L15 FPGA.M8 FPGA.N13 FPGA.P3 FPGA.P14 FPGA.R6 FPGA.R10 FPGA.T1 FPGA.T16 GPIO.6 GPIO.9 GPIO.14 GPIO.20 GPIO.25 GPIO.30 GPIO.34 GPIO.39 MCU.10 MCU.20 MCU.27 MCU.74 MCU.99 MICRO-SD.6 MICRO-SD.GND1 MICRO-SD.GND2 MICRO-SD.GND3 OSC10M.2 R2.1 R3.2 R11.2 R13.1 R26.1 R27.2 R28.1 R36.1 R60.2 R62.1 RAM.A3 RAM.A7 RAM.B2 RAM.B8 RAM.D2 RAM.D8 RAM.E3 RAM.E7 RAM.J1 RAM.K9 REG12.2 REG18.2 REG33.2 USB-SERIAL.1 USB-SERIAL.5 USB-SERIAL.10 USB-SERIAL.11 USB-SERIAL.13 USB-SERIAL.15 USB-SERIAL.25 USB-SERIAL.35 USB-SERIAL.47 USB-SERIAL.51 USB.GND1 USB.GND2 USB.SH1 USB.SH2 USB.SH3 USB.SH4 WIFI.15
GPIO00: FPGA.A5 GPIO.11
GPIO01: FPGA.C6 GPIO.12
GPIO02: FPGA.B6 GPIO.13
GPIO03: FPGA.A6 GPIO.15
GPIO04: FPGA.C7 GPIO.16
GPIO05: FPGA.A7 GPIO.18
GPIO06: FPGA.A8 GPIO.22
GPIO07: FPGA.A4 GPIO.7 MCU.24
GPIO08: FPGA.C5 GPIO.3
GPIO09: FPGA.D5 GPIO.5
GPIO10: FPGA.C9 GPIO.24
GPIO11: FPGA.D9 GPIO.26
GPIO12: FPGA.C8 GPIO.19
GPIO13: FPGA.D8 GPIO.21
GPIO14: FPGA.B8 GPIO.23
GPIO15: FPGA.B5 GPIO.8
GPIO16: FPGA.D6 GPIO.10
GPIO21: FPGA.A11 GPIO.29
GPIO22: FPGA.A12 GPIO.31
GPIO23: FPGA.B12 GPIO.33 MCU.25
GPIO24: FPGA.A14 GPIO.35
GPIO25: FPGA.C13 GPIO.37
GPIO26: FPGA.C11 GPIO.32
GPIO27: FPGA.A13 GPIO.36
GPIO28: FPGA.B14 GPIO.38
GPIO29: FPGA.D12 GPIO.40
ID_SC: FPGA.C10 GPIO.28
ID_SD: FPGA.A10 GPIO.27
JTAG_ESP_TDO: R10.2 USB-SERIAL.18 WIFI.16
JTAG_FPGA_TDO: FPGA.E14 R20.1 WIFI.6
JTAG_MCU_TDI: MCU.77 R21.1 USB-SERIAL.17
JTAG_MCU_TDO: FPGA.C12 MCU.89
JTAG_TCK: FPGA.C14 MCU.76 R11.1 USB-SERIAL.16 WIFI.7
JTAG_TMS: FPGA.A15 MCU.72 R12.1 USB-SERIAL.19 WIFI.5
JTAG_TRST: MCU.90 USB-SERIAL.21
LED_ACT: MCU.15 R9.1
LED_B: MCU.92 R25.2
LED_G: MCU.95 R24.2
LED_R: MCU.96 R23.2
M3A0: FPGA.K5 RAM.H8
M3A1: FPGA.K6 RAM.H3
M3A2: FPGA.D1 RAM.H7
M3A3: FPGA.L4 RAM.J2
M3A4: FPGA.G5 RAM.J8
M3A5: FPGA.H4 RAM.J3
M3A6: FPGA.H3 RAM.J7
M3A7: FPGA.D3 RAM.K2
M3A8: FPGA.B2 RAM.K8
M3A9: FPGA.A2 RAM.K3
M3A10: FPGA.G6 RAM.H2
M3A11: FPGA.E3 RAM.K7
M3A12: FPGA.F3 RAM.L2
M3A13: FPGA.F6 RAM.L8
M3BA0: FPGA.C3 RAM.G2
M3BA1: FPGA.C2 RAM.G3
M3BA2: FPGA.B1 RAM.G1
M3CASN: FPGA.H5 RAM.G7
M3CKE: FPGA.F4 R28.2 RAM.F2
M3CLK: FPGA.E2 RAM.E8
M3CLKN: FPGA.E1 RAM.F8
M3CSN: FPGA.M4 RAM.G8
M3DQ0: FPGA.K2 RAM.B1
M3DQ1: FPGA.K1 RAM.B9
M3DQ2: FPGA.J3 RAM.C2
M3DQ3: FPGA.J1 RAM.C8
M3DQ4: FPGA.F2 RAM.D7
M3DQ5: FPGA.F1 RAM.D9
M3DQ6: FPGA.G3 RAM.D1
M3DQ7: FPGA.G1 RAM.D3
M3LDM: FPGA.J4 RAM.B3
M3LDQS_N: FPGA.H1 RAM.A8
M3LDQS_P: FPGA.H2 RAM.B7
M3ODT: FPGA.L5 R26.2 RAM.F9
M3RASN: FPGA.J6 RAM.F7
M3WE: FPGA.C1 RAM.F3
MCO1_CLK: FPGA.J16 MCU.67
N$1: MCU.71 R37.1
N$2: MCU.70 R38.1
N$3: MCU.54 R39.1
N$4: MCU.53 R40.1
N$5: R40.2 USB.DM2
N$6: R39.2 USB.DP2
N$7: R1.1 R2.2 USB-SERIAL.59
N$8: R3.1 USB-SERIAL.6
N$9: R4.1 USB-SERIAL.14
N$10: CFG.1 R5.2 R8.2
N$11: CFG.3 R5.1 USB-SERIAL.61
N$12: CFG.4 R7.2 USB-SERIAL.62
N$13: CFG.5 R6.2 USB-SERIAL.63
N$17: C2.1 C4.1 L3.2 USB-SERIAL.9
N$18: C1.1 C3.1 L2.2 USB-SERIAL.4
N$19: C6.2 USB-SERIAL.3 Y1.1
N$20: C5.1 USB-SERIAL.2 Y1.3
N$23: DVI.P19 R13.2
N$25: R23.1 RGB.1
N$26: DVI.P15 R17.1
N$27: DVI.P16 R18.1
N$28: DVI.P18 R19.1
N$36: R24.1 RGB.2
N$37: R25.1 RGB.3
N$40: C58.2 MCU.9 Y4.P$2
N$48: C59.2 MCU.8 Y4.P$1
N$54: R37.2 USB.DP1
N$59: BUSPWR.2 F1.1
N$60: ACT.A R9.2
N$62: R38.2 USB.DM1
N$65: A/V.RING1 C34.C
N$66: A/V.TIP C35.C
N$76: D1.C F1.2 L1.1
N$77: C14.2 C35.A R16.2
N$78: C15.2 C34.A R50.2
N$79: A/V.SLEEVE C16.2 R51.2 R56.1
N$80: R52.2 R56.2 R57.1
N$81: R53.2 R57.2 R58.1
N$82: R54.2 R58.2 R59.1
N$83: R55.2 R59.2 R60.1
N$119: L4.1 REG12.5
N$120: L5.1 REG18.5
N$121: L6.1 REG33.5
SD_CD: MCU.33 MICRO-SD.CD
SD_CLK: MCU.30 MICRO-SD.5 R14.2
SD_CS: MCU.29 MICRO-SD.2 R22.2
SD_DI: MCU.32 MICRO-SD.3
SD_DO: MCU.31 MICRO-SD.7
SDIO_CLK: MCU.80 WIFI.14
SDIO_CMD: MCU.83 WIFI.9
SDIO_D0: MCU.65 WIFI.10
SDIO_D1: MCU.66 WIFI.13
SDIO_D2: MCU.78 WIFI.11
SDIO_D3: MCU.79 WIFI.12
TMDS_CLKN: DVI.P12 FPGA.T4
TMDS_CLKP: DVI.P10 FPGA.P4
TMDS_D0N: DVI.P9 FPGA.T5
TMDS_D0P: DVI.P7 FPGA.R5
TMDS_D1N: DVI.P6 FPGA.T7
TMDS_D1P: DVI.P4 FPGA.R7
TMDS_D2N: DVI.P3 FPGA.T9
TMDS_D2P: DVI.P1 FPGA.R9
USB_DEVICE_DM: DEBUG.2 USB-SERIAL.7
USB_DEVICE_DP: DEBUG.3 USB-SERIAL.8
VBAT: BAT.PWR@1 MCU.6
VBUS: BUSPWR.1 DEBUG.1 R1.2
VCAP_1: C7.2 MCU.49
VCAP_2: C13.2 MCU.73
VIDEO_D0: FPGA.P12 R55.1
VIDEO_D1: FPGA.N9 R54.1
VIDEO_D2: FPGA.P11 R53.1
VIDEO_D3: FPGA.P9 R52.1
VIDEO_D4: FPGA.T10 R51.1
WIFI_INT: MCU.91 WIFI.4
WKUP: MCU.23 R27.1 USER.SW_A